# EAGLE board Scheme (EAGLE 8.3.2)
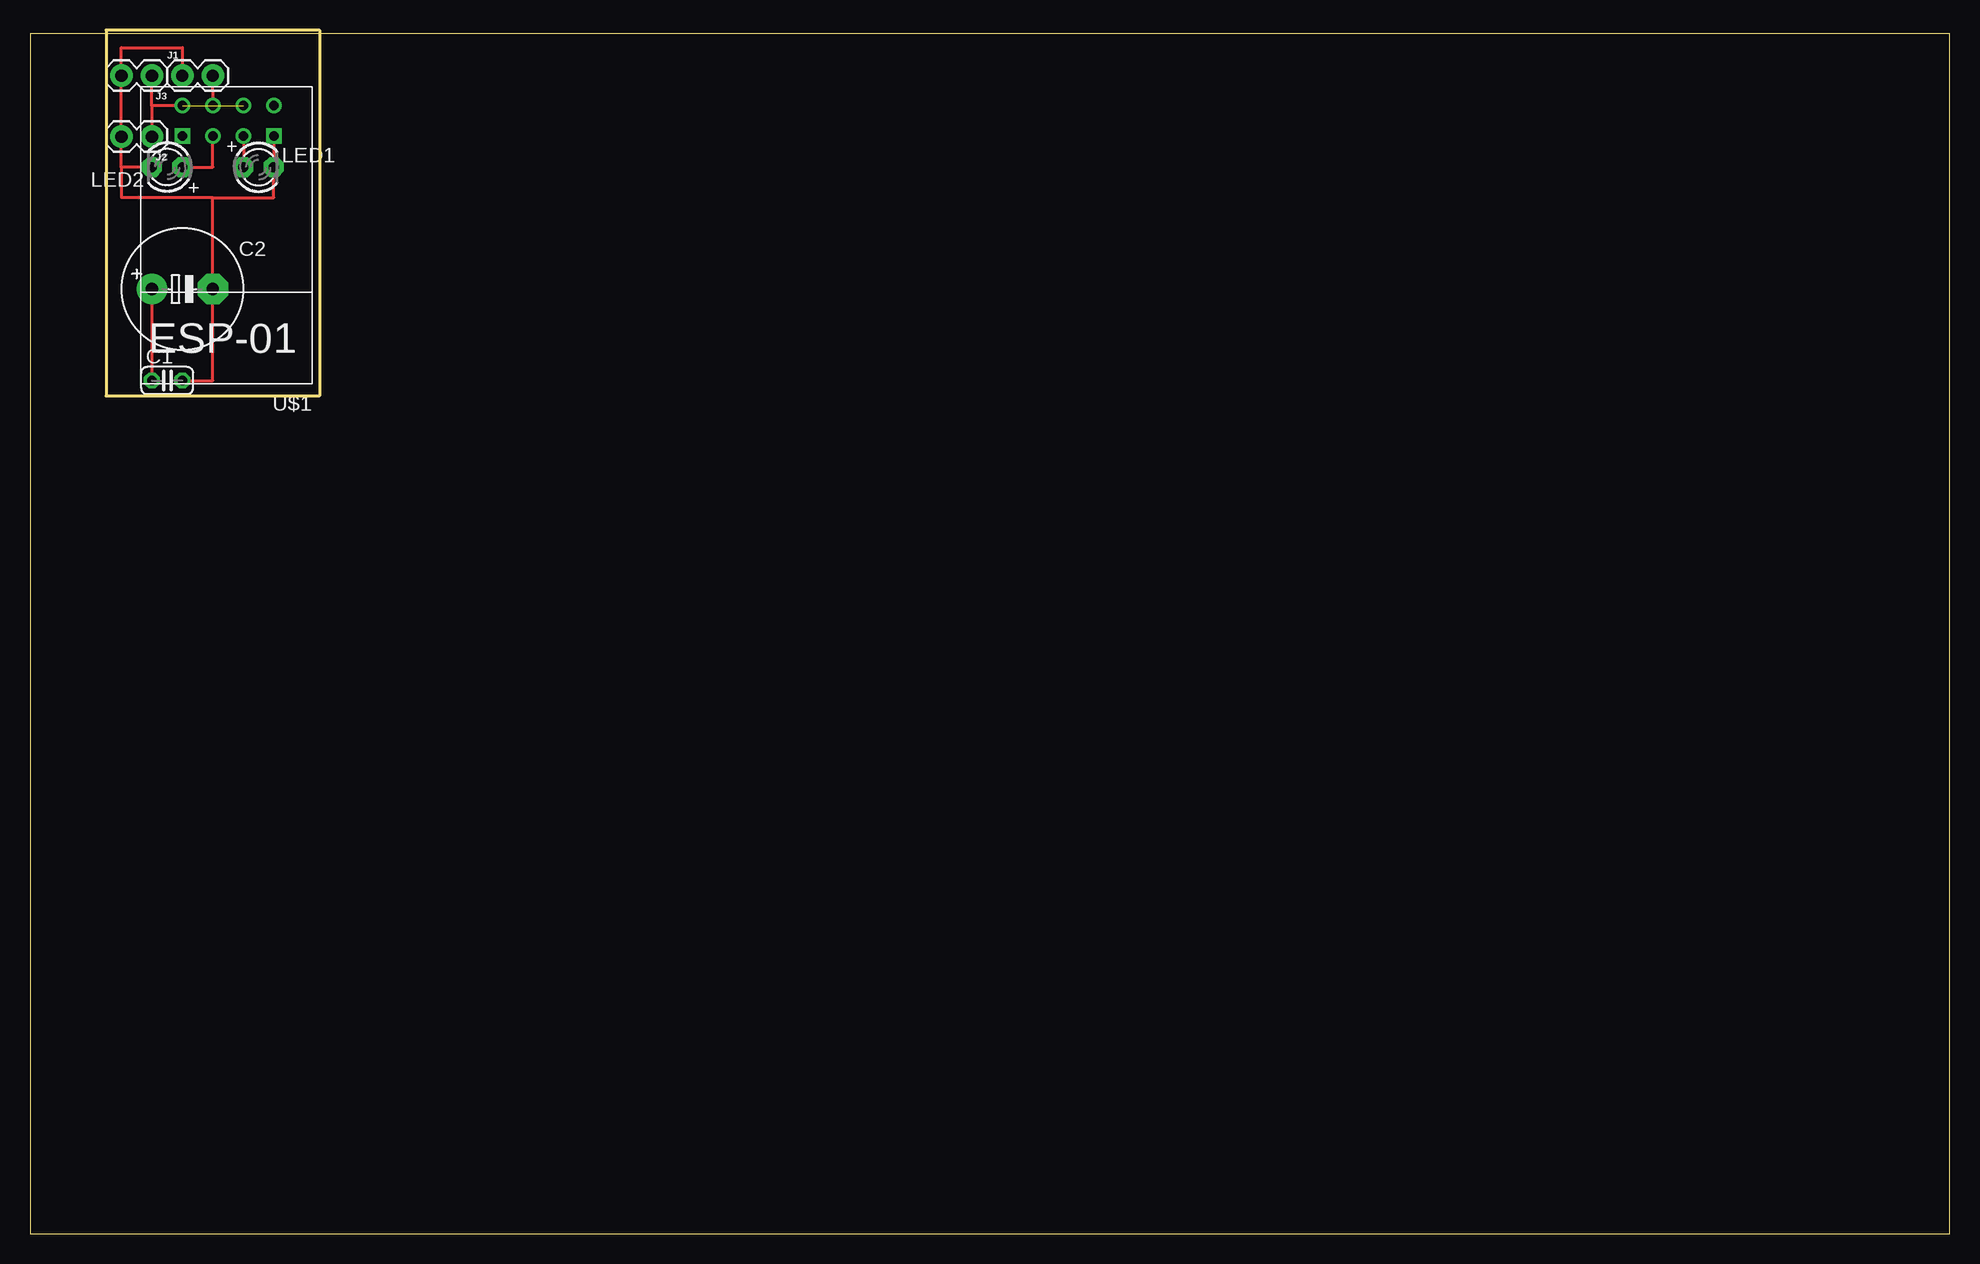
[diagram p0: board, top side]
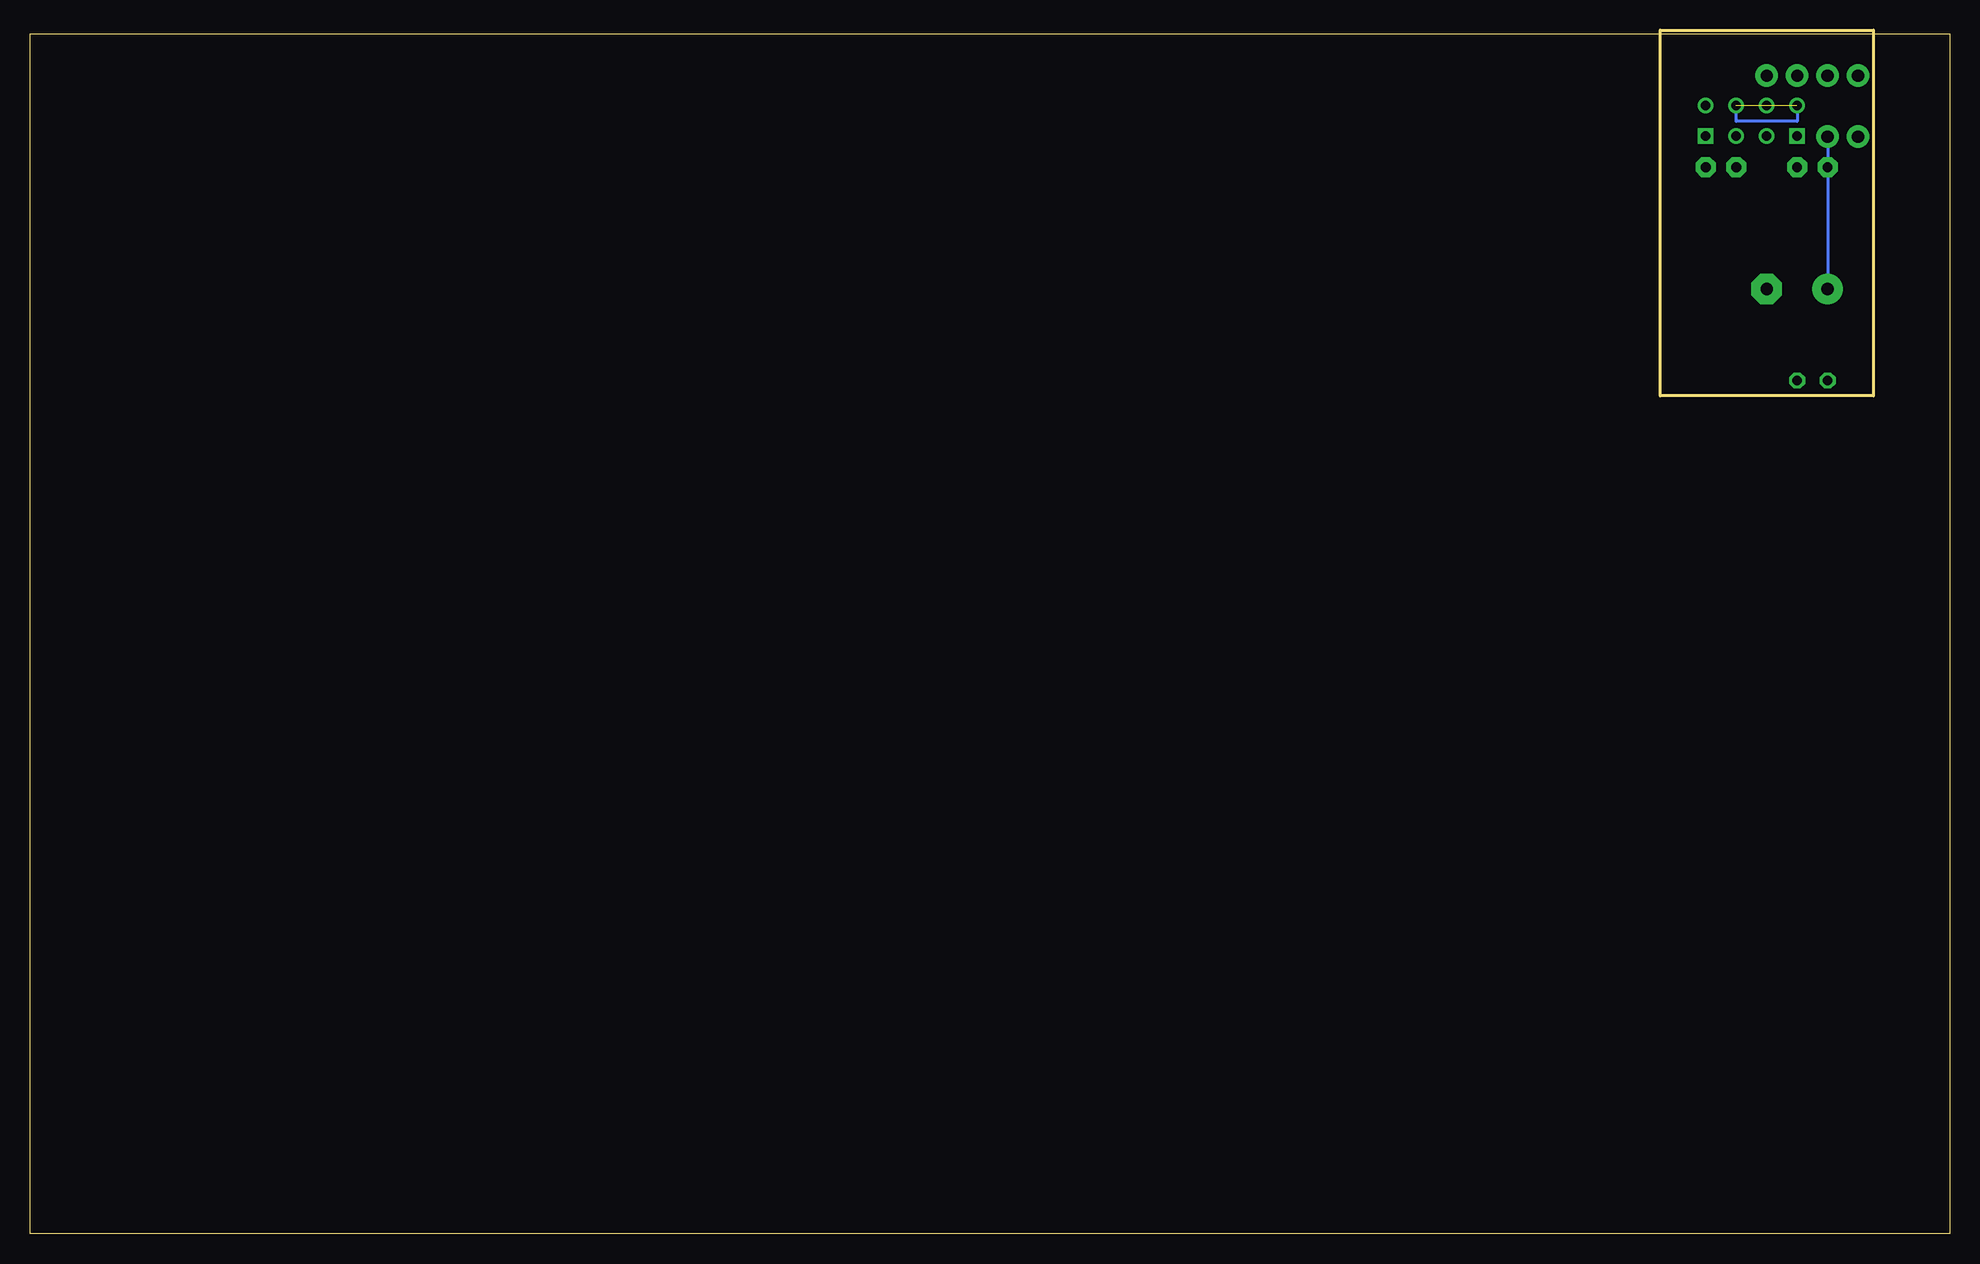
[diagram p1: board, bottom side, seen from below]

Size 160 x 100.33 mm. Coordinates in mm from the lower left corner, seen from the top.
Outline: 0,0 160,0 160,100 0,100 0,0
Outline: 24.13,100.33 24.13,69.85 6.35,69.85 6.35,100.33 24.13,100.33
Copper layers (1*16): Top 0.035mm / dielectric 1.5mm / Bottom 0.035mm
Design rules "default": minimum track width 6mil, minimum drill 0.35mm, track to track 6mil, track to pad 6mil, pad to pad 6mil, via to via 6mil, smd to smd 6mil, copper to edge 40mil, drill to drill 6mil, minimum pad ring 10mil, minimum via ring 8mil, stop-mask expansion 4mil, vias tented up to drill 0mil, thermal gap 10mil

## Footprints (pad centres in the part's own frame; a part is rotated, then mirrored left to right if it is on the bottom)
C025-024X044 = drill 0.813 octagon: 1 -1.27,0; 2 1.27,0
E5-10,5 = drill 1.016 pad 2.54: + -2.54,0 | drill 1.016 pad 2.54 octagon: - 2.54,0
1X02 = drill 1.016 pad 1.88: 1 0,0; 2 2.54,0
LED3MM = drill 0.813 pad 1.676 octagon: A -1.27,0; K 1.27,0
ESP01 = drill 0.8: CH_PD -1.285,-8.178; GPIO0 1.255,-5.638; GPIO2 -1.285,-5.638; RST 1.255,-8.178; TX -3.825,-8.178; VCC 3.795,-8.178 | drill 0.8 square: GND -3.825,-5.638; RX 3.795,-5.638

## Placement (x,y rotation side)
C1  [C025-024X044]  11.43,71.12 0 top
C2  [E5-10,5]  12.7,78.74 0 top
J1  [1X02]  12.7,96.52 0 top
J2  [1X02]  10.16,91.44 180 top
J3  [1X02]  10.16,96.52 180 top
LED1  [LED3MM]  19.05,88.9 0 top
LED2  [LED3MM]  11.43,88.9 180 top
U$1  ESP01  [ESP01]  16.51,85.85 180 top

## Library data of the parts
C1 C2 = rcl
J1-J3 = SparkFun-Connectors
LED1 LED2 = adafruit
U$1 = esp8266modules

## Nets
GND: C1.2 C2.- J1.1 J2.2 J3.2 LED1.K LED2.K U$1.GND
N$3: LED1.A U$1.GPIO2
N$4: LED2.A U$1.GPIO0
N$6: J1.2 U$1.RST
VCC: C1.1 C2.+ J2.1 J3.1 U$1.CH_PD U$1.VCC

## Tracks (layer width: path | path; a pad name or v marks a point on that pad's centre or on a via)
GND
  Top 0.254: U$1.GND 20.34,88.92 LED1.K 20.32,86.36 15.24,86.36 | 7.62,88.9 J2.2 J3.2 7.62,98.86 12.7,98.86 J1.1 | 7.62,88.9 7.62,86.36 15.24,86.36 | LED2.K 7.62,88.9 | 15.24,86.36 C2.- 15.24,71.12 C1.2
N$1
  Bottom 0.254: 12.7,93.98 12.7,92.71 17.78,92.71 17.78,93.98
N$3
  Top 0.254: U$1.GPIO2 17.8,88.92 LED1.A
N$4
  Top 0.254: LED2.A 15.24,88.9 15.24,91.47 U$1.GPIO0
N$6
  Top 0.254: U$1.RST J1.2
VCC  (1 unrouted)
  Top 0.254: 10.16,93.98 J2.1 | 10.16,93.98 J3.1 | C2.+ C1.1 | 12.7,94.04 U$1.VCC 10.21,94.03 10.16,93.98
  Bottom 0.254: J2.1 C2.+